# Altium PCB DebugProbe.PcbDoc
Units mm, origin at the board's own origin, x right, y up, seen from the top; angles counter-clockwise.
Board outline 25.65 x 75.44 mm, 2 copper layers (Top Layer, Bottom Layer); 3 components, 56 nets, 112 pads, 0 vias.
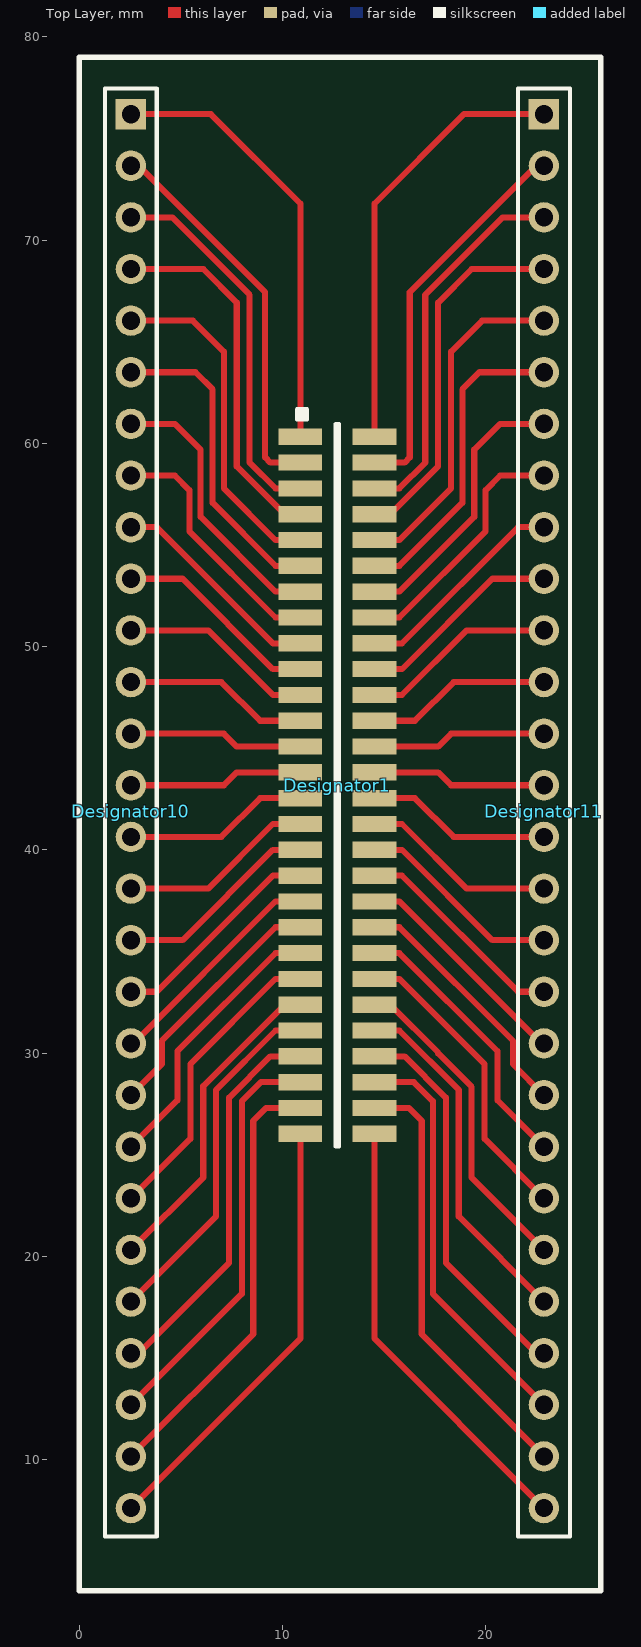
[diagram p0: Top Layer view]
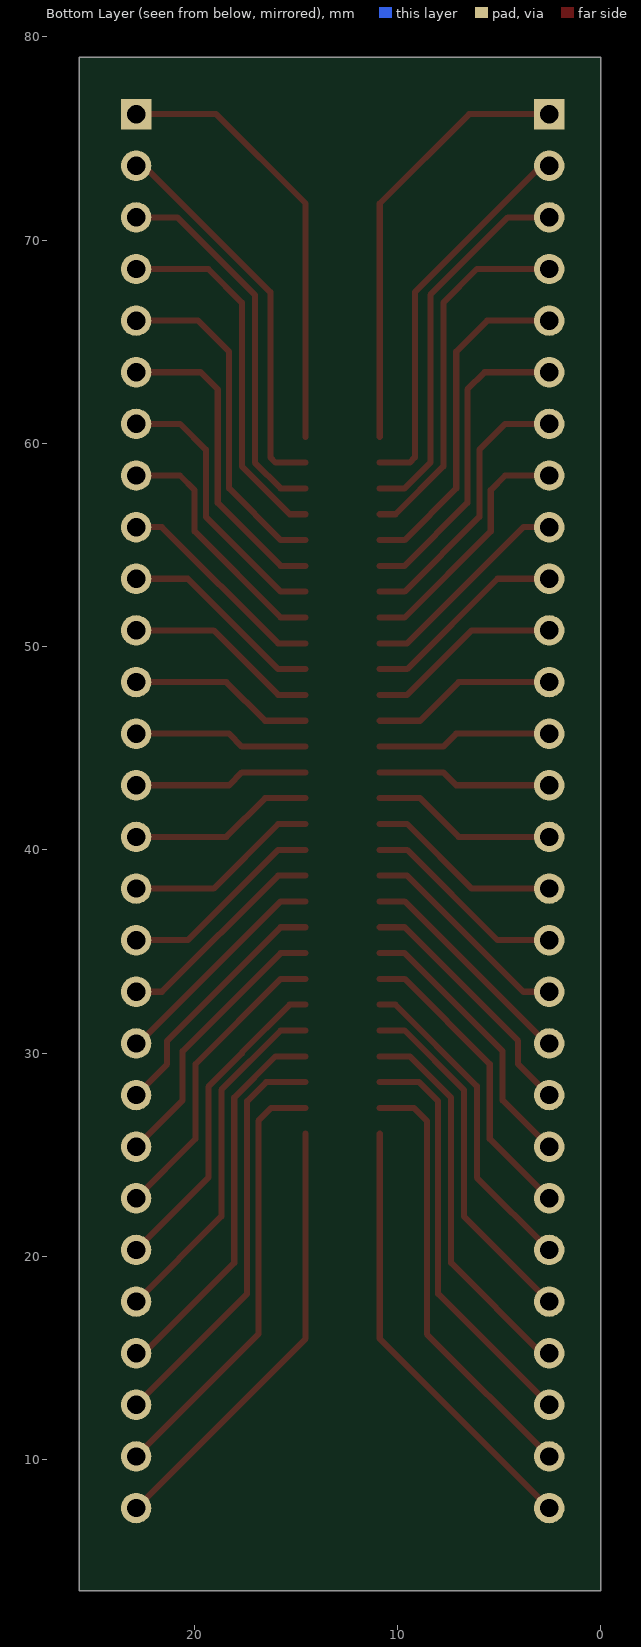
[diagram p1: Bottom Layer view, seen from below]

## Layer stack, top to bottom
Top Solder: solder mask 0.0102, Solder Resist, Dk 3.5
Top Layer: signal copper 0.0356
Dielectric 1: dielectric 0.32, FR-4, Dk 4.8
Bottom Layer: signal copper 0.0356
Bottom Solder: solder mask 0.0102, Solder Resist, Dk 3.5

## Board outline
0,3.556 0,78.994 25.654,78.994 25.654,3.556

## Design rules (kind name [scope] priority, off if disabled: settings)
Clearance [All] p1: gap=0.254
PolygonConnect [All] p1: connectstyle=Relief reliefconductorwidth=0.254 reliefentries=4 polygonreliefangle="90 Angle" airgapwidth=0.254
RoutingLayers [All] p1: top layer_v5=TRUE bottom layer_v5=FALSE
RoutingVias [All] p1: holewidth=0.711 width=1.27 viastyle="Through Hole" minholewidth=0.711 minwidth=1.27 maxholewidth=0.711 maxwidth=1.27
SolderMaskExpansion [All] p1: expansion=0.102
Width [All] p1: maxlimit=12.7 minlimit=0.254 preferedwidth=1.27
29 further rules are at their usual default settings.

## Components (designator, comment, footprint, x,y, rotation, side; value= is the part's Value field where it differs from the comment)
Designator1 "Comment" "GOLDPIN 1.27MM SOCKET 2X28 SMD" 12.7,43.18 r0 top
Designator10 "Comment" "HEADER 28X1" 2.54,30.48 r270 top
Designator11 "Comment" "HEADER 28X1" 22.86,30.48 r270 top

## Footprints (in the part's own frame and the unit in brackets; to place one, negate y for a bottom-side part, rotate by r counter-clockwise, add the part's x,y. Pads: shape width x height; smd on the part's side, far side on the other; paste and mask are expansions set on the pad)
"GOLDPIN 1.27MM SOCKET 2X28 SMD" [mm]
  rect 2.15x0.8 smd: 1(-1.825,17.145) 2(-1.825,15.875) 3(-1.825,14.605) 4(-1.825,13.335) 5(-1.825,12.065) 6(-1.825,10.795) 7(-1.825,9.525) 8(-1.825,8.255) 9(-1.825,6.985) 10(-1.825,5.715) 11(-1.825,4.445) 12(-1.825,3.175) 13(-1.825,1.905) 14(-1.825,0.635) 15(-1.825,-0.635) 16(-1.825,-1.905) 17(-1.825,-3.175) 18(-1.825,-4.445) 19(-1.825,-5.715) 20(-1.825,-6.985) 21(-1.825,-8.255) 22(-1.825,-9.525) 23(-1.825,-10.795) 24(-1.825,-12.065) 25(-1.825,-13.335) 26(-1.825,-14.605) 27(-1.825,-15.875) 28(-1.825,-17.145) 29(1.825,-17.145) 30(1.825,-15.875) 31(1.825,-14.605) 32(1.825,-13.335) 33(1.825,-12.065) 34(1.825,-10.795) 35(1.825,-9.525) 36(1.825,-8.255) 37(1.825,-6.985) 38(1.825,-5.715) 39(1.825,-4.445) 40(1.825,-3.175) 41(1.825,-1.905) 42(1.825,-0.635) 43(1.825,0.635) 44(1.825,1.905) 45(1.825,3.175) 46(1.825,4.445) 47(1.825,5.715) 48(1.825,6.985) 49(1.825,8.255) 50(1.825,9.525) 51(1.825,10.795) 52(1.825,12.065) 53(1.825,13.335) 54(1.825,14.605) 55(1.825,15.875) 56(1.825,17.145)
  silkscreen extent -2,-17.78 0.08,18.5, body extent -1.55,-17.3 1.55,17.3, height 4.4
"HEADER 28X1" [mm] "Connector; Header; 10 Position"
  rect 1.5x1.5 hole 0.9: 1(-45.72,0)
  round 1.5 hole 0.9: 2(-43.18,0) 3(-40.64,0) 4(-38.1,0) 5(-35.56,0) 6(-33.02,0) 7(-30.48,0) 8(-27.94,0) 9(-25.4,0) 10(-22.86,0) 11(-20.32,0) 12(-17.78,0) 13(-15.24,0) 14(-12.7,0) 15(-10.16,0) 16(-7.62,0) 17(-5.08,0) 18(-2.54,0) 19(0,0) 20(2.54,0) 21(5.08,0) 22(7.62,0) 23(10.16,0) 24(12.7,0) 25(15.24,0) 26(17.78,0) 27(20.32,0) 28(22.86,0)
  silkscreen extent -46.99,-1.27 24.26,1.27

## Nets (pads, with @x,y where several pads share a name; then routed paths per layer and width w, separated by ;. In a path a pad name is that pad's centre, name@x,y a point inside that pad or via, vN(x,y) a via of type N, cw(c..) or ccw(c..) an arc to the next point about the centre after c; other vN are vias at no path point)
0: Designator1.11 Designator10.11 | length 9.7
  Top Layer w0.3: Designator10.11 6.35,50.8 9.525,47.625 Designator1.11
2: Designator1.3 Designator10.3 | length 18.7
  Top Layer w0.3: Designator10.3 4.572,71.12 8.382,67.31 8.382,59.055 9.652,57.785 Designator1.3
3: Designator1.4 Designator10.4 | length 18.1
  Top Layer w0.3: Designator10.4 6.096,68.58 7.747,66.929 7.747,58.867 10.099,56.515 Designator1.4
4: Designator1.5 Designator10.5 | length 16.7
  Top Layer w0.3: Designator10.5 5.588,66.04 7.112,64.516 7.112,57.785 9.652,55.245 Designator1.5
5: Designator1.6 Designator10.6 | length 15.6
  Top Layer w0.3: Designator10.6 5.715,63.5 6.558,62.657 6.558,57.069 9.652,53.975 Designator1.6
6: Designator1.7 Designator10.7 | length 13.7
  Top Layer w0.3: Designator10.7 4.699,60.96 5.969,59.69 5.969,56.388 9.652,52.705 Designator1.7
7: Designator1.8 Designator10.8 | length 12.4
  Top Layer w0.3: Designator10.8 4.699,58.42 5.415,57.704 5.415,55.672 9.652,51.435 Designator1.8
8: Designator1.9 Designator10.9 | length 10.7
  Top Layer w0.3: Designator10.9 3.81,55.88 9.525,50.165 Designator1.9
9: Designator1.10 Designator10.10 | length 10.2
  Top Layer w0.3: Designator10.10 5.08,53.34 9.525,48.895 Designator1.10
10: Designator1.12 Designator10.12 | length 9.1
  Top Layer w0.3: Designator10.12 6.985,48.26 8.89,46.355 Designator1.12
11: Designator1.13 Designator10.13 | length 8.6
  Top Layer w0.3: Designator10.13 7.112,45.72 7.747,45.085 Designator1.13
12: Designator1.14 Designator10.14 | length 8.6
  Top Layer w0.3: Designator10.14 7.112,43.18 7.747,43.815 Designator1.14
13: Designator1.15 Designator10.15 | length 9.1
  Top Layer w0.3: Designator10.15 6.985,40.64 8.89,42.545 Designator1.15
14: Designator1.16 Designator10.16 | length 9.7
  Top Layer w0.3: Designator10.16 6.35,38.1 9.525,41.275 Designator1.16
15: Designator1.17 Designator10.17 | length 10.2
  Top Layer w0.3: Designator10.17 5.08,35.56 9.525,40.005 Designator1.17
16: Designator1.18 Designator10.18 | length 10.7
  Top Layer w0.3: Designator10.18 3.81,33.02 9.525,38.735 Designator1.18
17: Designator1.19 Designator10.19 | length 11.2
  Top Layer w0.3: Designator10.19 2.667,30.48 9.652,37.465 Designator1.19
18: Designator1.20 Designator10.20 | length 12.4
  Top Layer w0.3: Designator10.20 4.064,29.464 4.064,30.607 9.652,36.195 Designator1.20
19: Designator1.21 Designator10.21 | length 13.7
  Top Layer w0.3: Designator10.21 4.826,27.686 4.826,30.099 9.652,34.925 Designator1.21
20: Designator1.22 Designator10.22 | length 15
  Top Layer w0.3: Designator10.22 5.461,25.781 5.461,29.464 9.652,33.655 Designator1.22
21: Designator1.23 Designator10.23 | length 16
  Top Layer w0.3: Designator10.23 6.096,23.876 6.096,28.382 10.099,32.385 Designator1.23
22: Designator1.24 Designator10.24 | length 17.5
  Top Layer w0.3: Designator10.24 6.731,21.971 6.731,28.194 9.652,31.115 Designator1.24
23: Designator1.25 Designator10.25 | length 19.1
  Top Layer w0.3: Designator10.25 2.921,15.24 7.366,19.685 7.366,27.813 9.398,29.845 Designator1.25
24: Designator1.26 Designator10.26 | length 20.5
  Top Layer w0.3: Designator10.26 8.001,18.161 8.001,27.64 8.936,28.575 Designator1.26
25: Designator1.27 Designator10.27 | length 21.6
  Top Layer w0.3: Designator10.27 8.555,16.175 8.555,26.67 9.19,27.305 Designator1.27
26: Designator1.28 Designator10.28 | length 21.9
  Top Layer w0.3: Designator10.28 10.875,15.955 Designator1.28
27: Designator1.29 Designator11.28 | length 21.9
  Top Layer w0.3: Designator1.29 14.525,15.955 Designator11.28
28: Designator1.30 Designator11.27 | length 21.6
  Top Layer w0.3: Designator1.30 16.21,27.305 16.845,26.67 16.845,16.175 Designator11.27
29: Designator1.31 Designator11.26 | length 20.5
  Top Layer w0.3: Designator1.31 16.464,28.575 17.399,27.64 17.399,18.161 Designator11.26
30: Designator1.32 Designator11.25 | length 19.1
  Top Layer w0.3: Designator1.32 16.002,29.845 18.034,27.813 18.034,19.685 22.479,15.24 Designator11.25
31: Designator1.33 Designator11.24 | length 17.5
  Top Layer w0.3: Designator1.33 15.748,31.115 18.669,28.194 18.669,21.971 Designator11.24
32: Designator1.34 Designator11.23 | length 16
  Top Layer w0.3: Designator1.34 15.301,32.385 17.653,30.033 17.653,29.993 19.304,28.342 19.304,23.876 Designator11.23
33: Designator1.35 Designator11.22 | length 15
  Top Layer w0.3: Designator1.35 15.748,33.655 19.939,29.464 19.939,25.781 Designator11.22
34: Designator1.36 Designator11.21 | length 13.7
  Top Layer w0.3: Designator1.36 15.748,34.925 20.574,30.099 20.574,27.686 Designator11.21
35: Designator1.37 Designator11.20 | length 12.4
  Top Layer w0.3: Designator1.37 15.748,36.195 21.336,30.607 21.336,29.464 Designator11.20
36: Designator1.38 Designator11.19 | length 11.2
  Top Layer w0.3: Designator1.38 15.748,37.465 22.733,30.48 Designator11.19
37: Designator1.39 Designator11.18 | length 10.7
  Top Layer w0.3: Designator1.39 15.875,38.735 21.59,33.02 Designator11.18
38: Designator1.40 Designator11.17 | length 10.2
  Top Layer w0.3: Designator1.40 15.875,40.005 20.32,35.56 Designator11.17
39: Designator1.41 Designator11.16 | length 9.7
  Top Layer w0.3: Designator1.41 15.875,41.275 19.05,38.1 Designator11.16
40: Designator1.42 Designator11.15 | length 9.1
  Top Layer w0.3: Designator1.42 16.51,42.545 18.415,40.64 Designator11.15
41: Designator1.43 Designator11.14 | length 8.6
  Top Layer w0.3: Designator1.43 17.653,43.815 18.288,43.18 Designator11.14
42: Designator1.44 Designator11.13 | length 8.6
  Top Layer w0.3: Designator1.44 17.653,45.085 18.288,45.72 Designator11.13
43: Designator1.45 Designator11.12 | length 9.1
  Top Layer w0.3: Designator1.45 16.51,46.355 18.415,48.26 Designator11.12
44: Designator1.46 Designator11.11 | length 9.7
  Top Layer w0.3: Designator1.46 15.875,47.625 19.05,50.8 Designator11.11
45: Designator1.47 Designator11.10 | length 10.2
  Top Layer w0.3: Designator1.47 15.875,48.895 20.32,53.34 Designator11.10
46: Designator1.48 Designator11.9 | length 10.7
  Top Layer w0.3: Designator1.48 15.875,50.165 21.59,55.88 Designator11.9
47: Designator1.49 Designator11.8 | length 12.4
  Top Layer w0.3: Designator1.49 15.748,51.435 19.985,55.672 19.985,57.704 20.701,58.42 Designator11.8
48: Designator1.50 Designator11.7 | length 13.7
  Top Layer w0.3: Designator1.50 15.748,52.705 19.431,56.388 19.431,59.69 20.701,60.96 Designator11.7
49: Designator1.51 Designator11.6 | length 15.6
  Top Layer w0.3: Designator1.51 15.748,53.975 18.842,57.069 18.842,62.657 19.685,63.5 Designator11.6
50: Designator1.52 Designator11.5 | length 16.7
  Top Layer w0.3: Designator1.52 15.748,55.245 18.288,57.785 18.288,64.516 19.812,66.04 Designator11.5
51: Designator1.53 Designator11.4 | length 18.1
  Top Layer w0.3: Designator1.53 15.301,56.515 17.653,58.867 17.653,66.929 19.304,68.58 Designator11.4
52: Designator1.54 Designator11.3 | length 18.7
  Top Layer w0.3: Designator1.54 15.748,57.785 17.018,59.055 17.018,67.31 20.828,71.12 Designator11.3
53: Designator1.55 Designator11.2 | length 19.1
  Top Layer w0.3: Designator1.55 16.002,59.055 16.256,59.309 16.256,67.437 22.479,73.66 Designator11.2
54: Designator1.56 Designator11.1 | length 21.6
  Top Layer w0.3: Designator1.56 14.525,71.802 18.923,76.2 Designator11.1
NewNet: Designator1.1 Designator10.1 | length 21.6
  Top Layer w0.3: Designator10.1 6.477,76.2 10.875,71.802 Designator1.1
NewNet1: Designator1.2 Designator10.2 | length 19.1
  Top Layer w0.3: Designator10.2 2.921,73.66 9.144,67.437 9.144,59.309 9.398,59.055 Designator1.2

## Silkscreen, mask and mechanical layers (free items; w line width, h text height)
Top Overlay:
  the board outline again, w0.254